# Altium PCB PCB12.PcbDoc
Units mil, origin at the board's own origin, x right, y up, seen from the top; angles counter-clockwise.
Board outline 6000 x 4000 mil, 2 copper layers (Top Layer, Bottom Layer); 16 components, 21 nets, 90 pads, 0 vias.
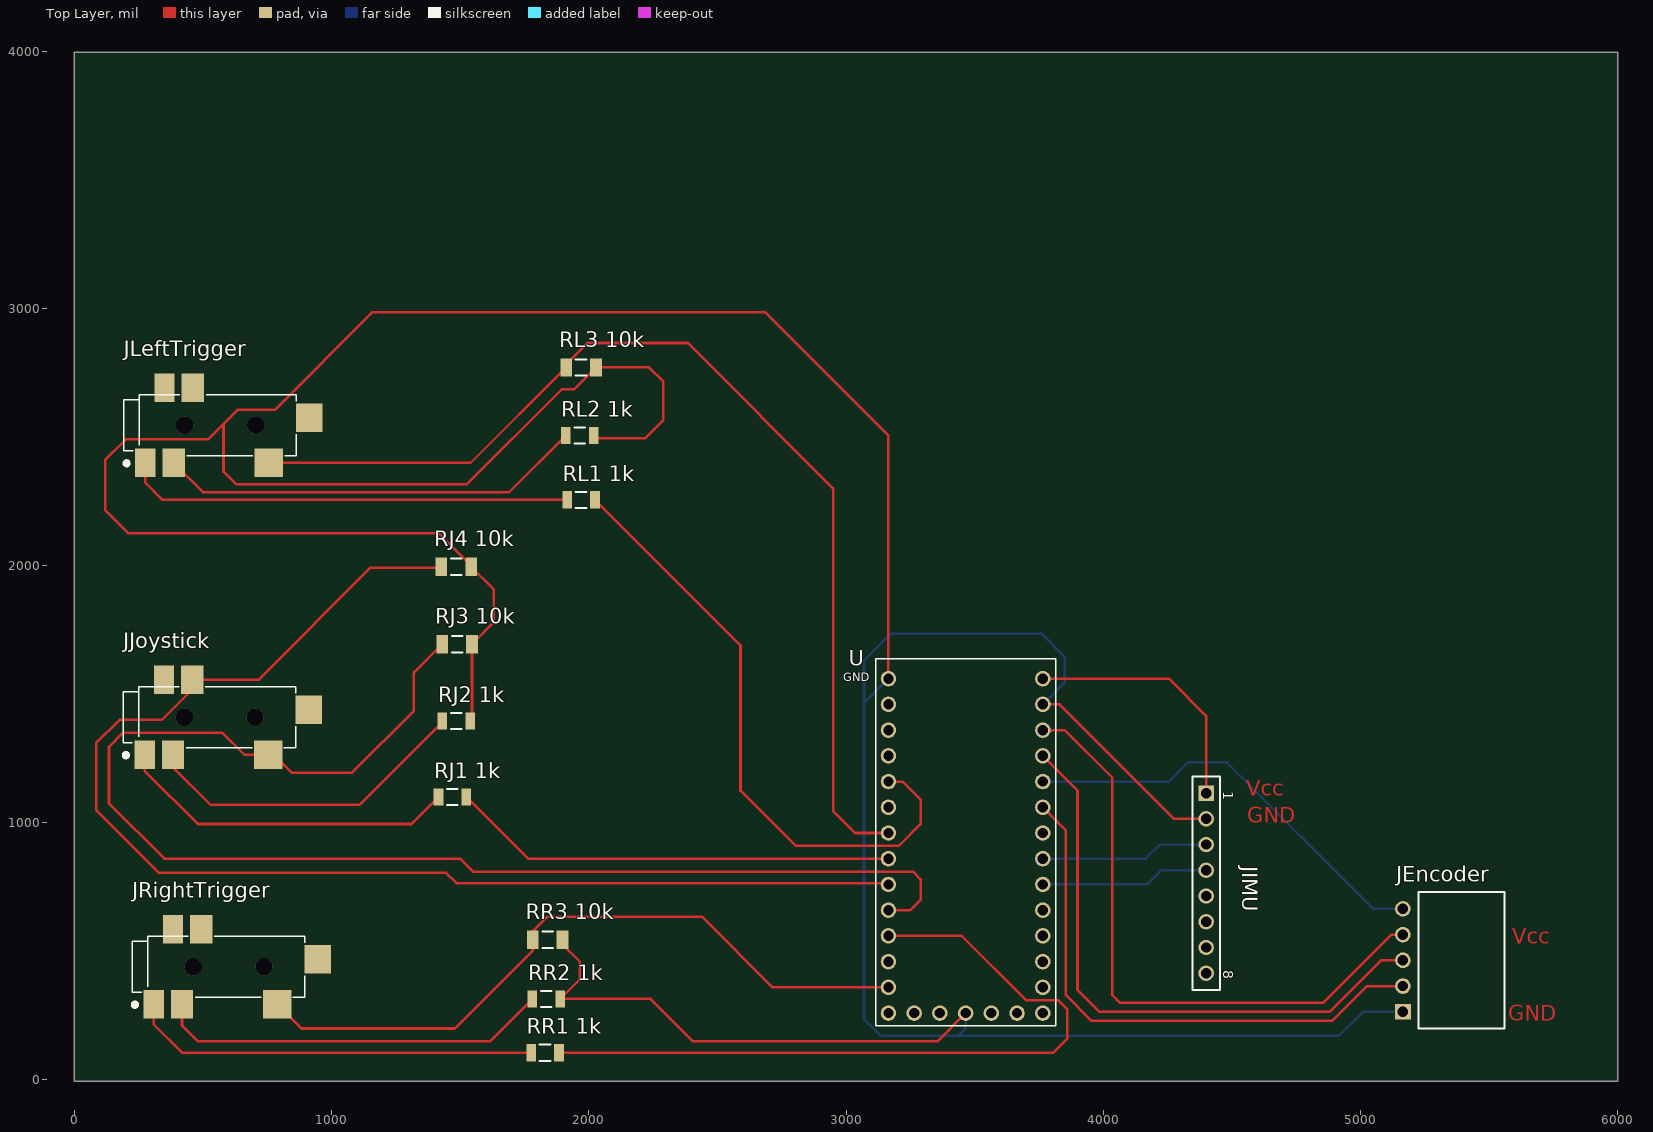
[diagram p0: Top Layer view]
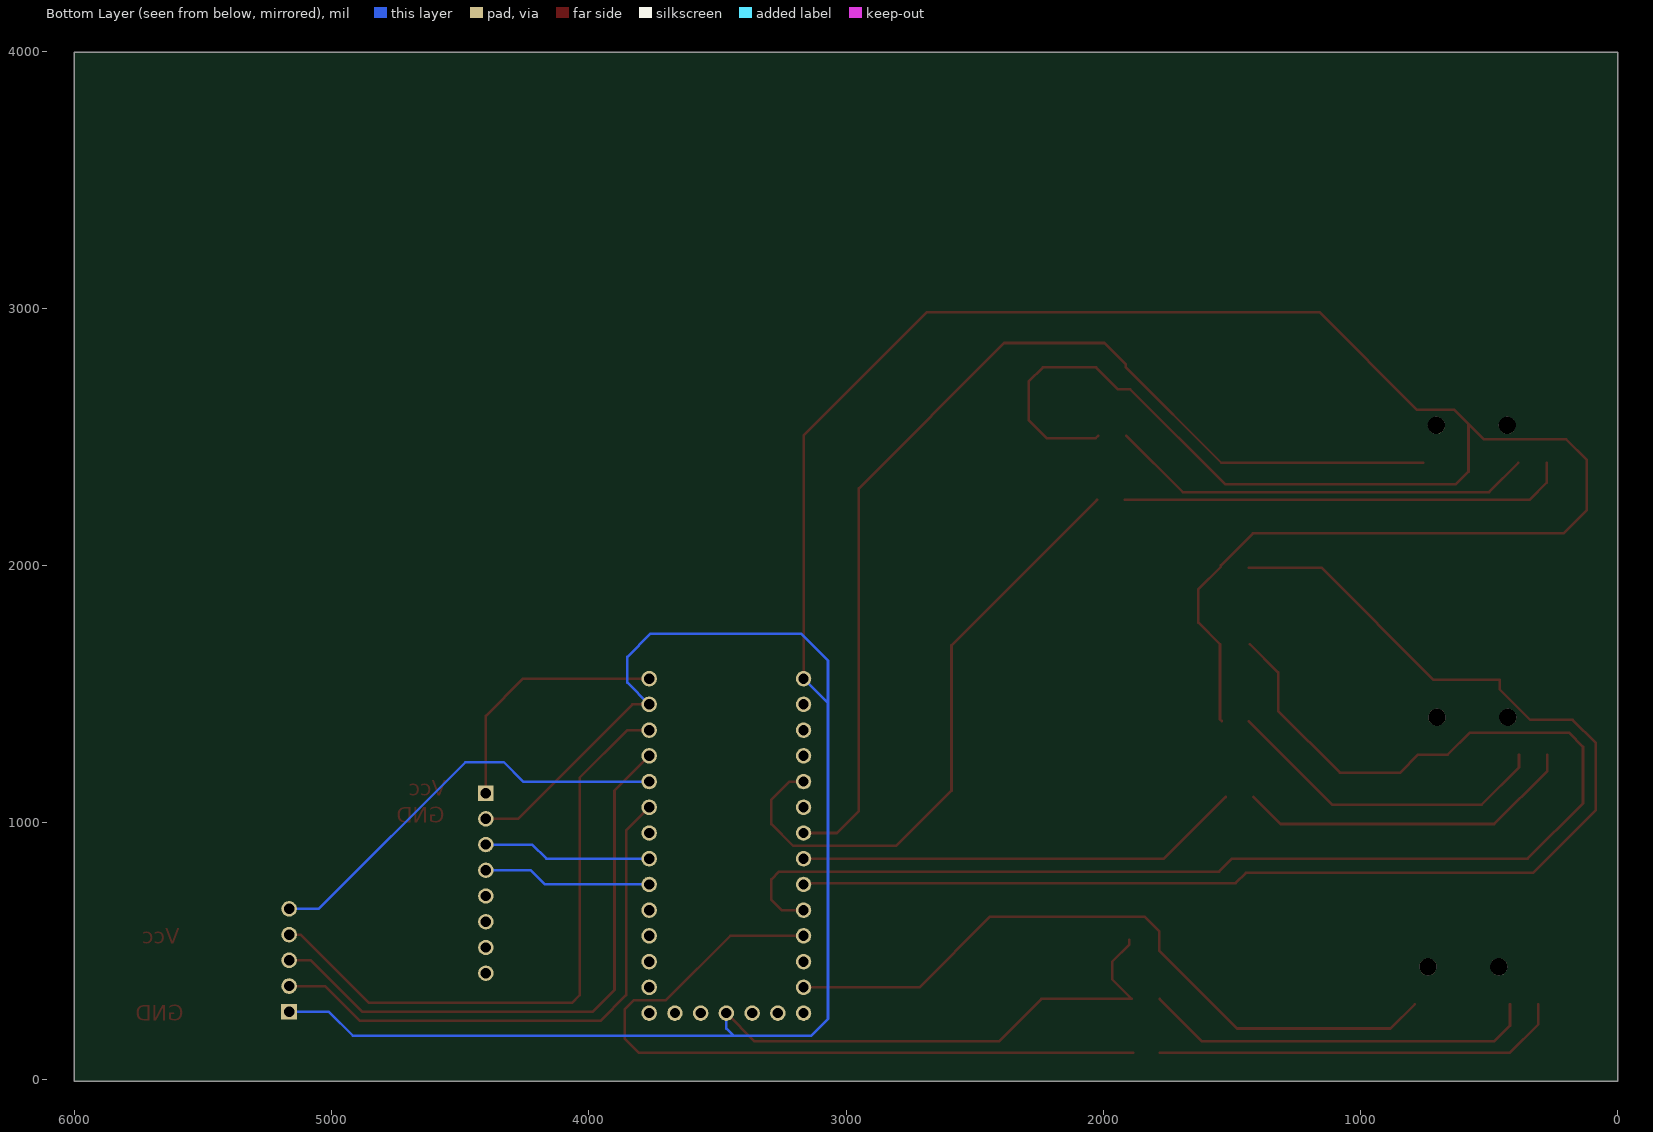
[diagram p1: Bottom Layer view, seen from below]
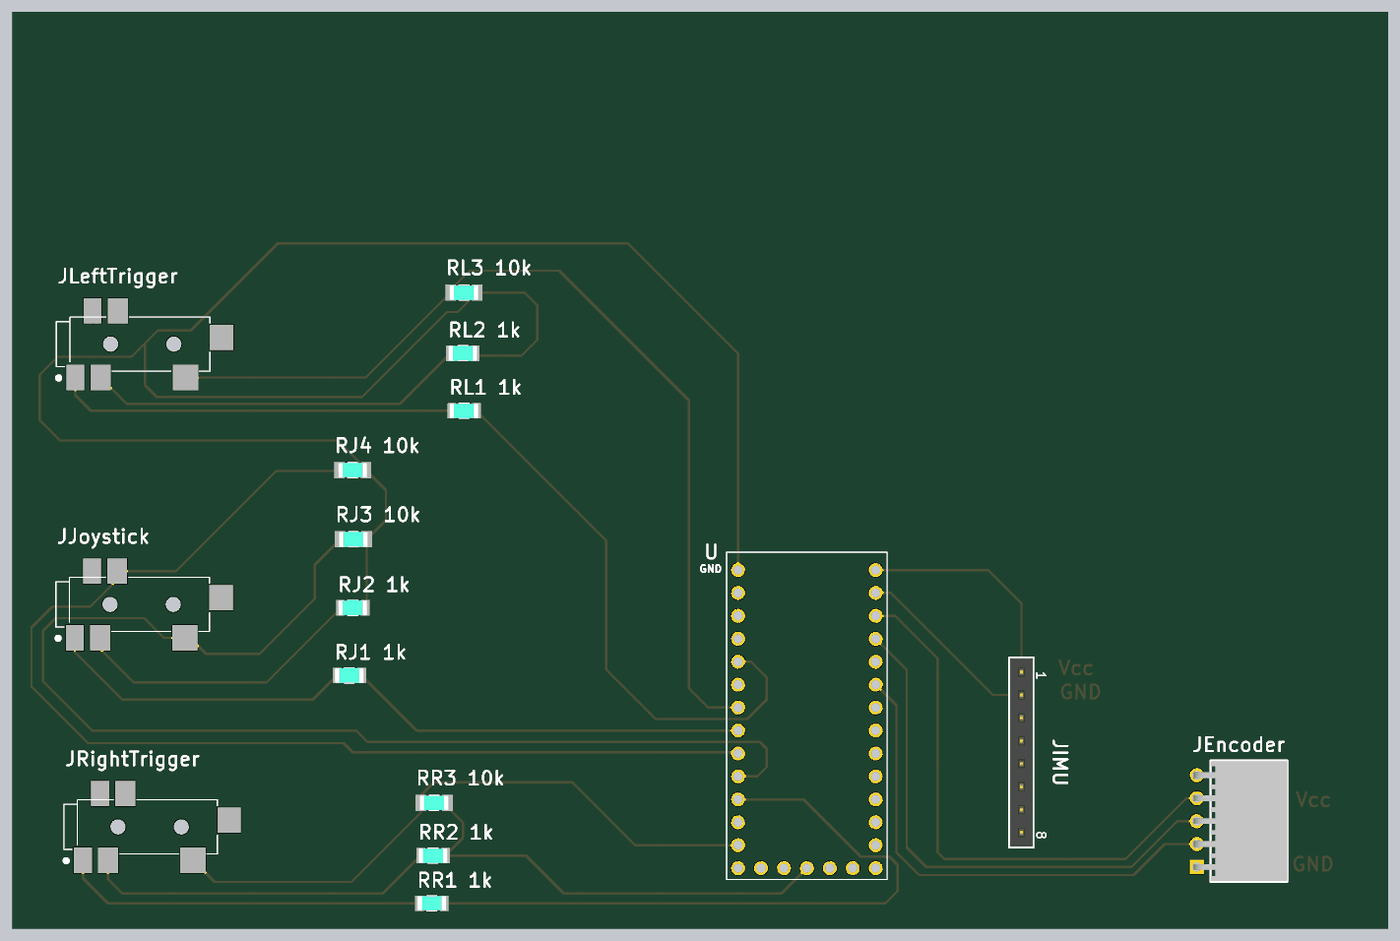
[diagram p2: 3D render of the assembled board from above, using the file's embedded part models]

## Layer stack, top to bottom
Top Solder: solder mask 0.4, Solder Resist, Dk 3.5
Top Layer: signal copper 1.4
Dielectric 1: dielectric 12.6, FR-4, Dk 4.8
Bottom Layer: signal copper 1.4
Bottom Solder: solder mask 0.4, Solder Resist, Dk 3.5

## Board outline
0,-5 6000,-5 6000,3995 0,3995

## Design rules (kind name [scope] priority, off if disabled: settings)
Clearance [All] p1: gap=10 ignorepadtopadclearanceinfootprint=FALSE except(0: Arc-Hole Track-Hole SMDPad-Hole THPad-Hole Via-Hole Fill-Hole Poly-Hole Region-Hole Text-Hole)
PolygonConnect [All] p1: connectstyle=Relief reliefconductorwidth=10 reliefentries=4 polygonreliefangle="90 Angle" airgapwidth=10
RoutingVias [All] p1: holewidth=28 width=50 viastyle="Through Hole" minholewidth=28 minwidth=50 maxholewidth=28 maxwidth=50
SolderMaskExpansion [All] p1: expansion=4
Width [All] p1: maxlimit=10 minlimit=10 preferedwidth=10
30 further rules are at their usual default settings.

## Components (designator, comment, footprint, x,y, rotation, side; value= is the part's Value field where it differs from the comment)
JEncoder "SSQ-105-02-T-S-RA" SMTC-SSQ-105-02-X-S-RA 5165,265 r90 top
JIMU "61300811821" 61300811821 4400,765 r270 top
JJoystick "SJ-43516-SMT-BE" CUI_SJ-43516-SMT-BE 555,1410 r0 top
JLeftTrigger "SJ-43516-SMT-BE" CUI_SJ-43516-SMT-BE 557.36,2545 r0 top
JRightTrigger "SJ-43516-SMT-BE" CUI_SJ-43516-SMT-BE 590,440 r0 top
"RJ1 1k" "RN732BTTDK1001B25" FP-RN732B-IPC_C 1470,1100 r0 top
"RJ2 1k" "RN732BTTDK1001B25" FP-RN732B-IPC_C 1485,1395 r0 top
"RJ3 10k" "RN732BTTD1002D10" FP-RN732B-IPC_B 1488.09,1693.82 r0 top
"RJ4 10k" "RN732BTTD1002D10" FP-RN732B-IPC_B 1485,1995 r0 top
"RL1 1k" "RN732BTTDK1001B25" FP-RN732B-IPC_C 1970,2255 r0 top
"RL2 1k" "RN732BTTDK1001B25" FP-RN732B-IPC_C 1965,2505 r0 top
"RL3 10k" "RN732BTTD1002D10" FP-RN732B-IPC_B 1970,2770 r0 top
"RR1 1k" "RN732BTTDK1001B25" FP-RN732B-IPC_C 1830,105.85 r0 top
"RR2 1k" "RN732BTTDK1001B25" FP-RN732B-IPC_C 1835,315 r0 top
"RR3 10k" "RN732BTTD1002D10" FP-RN732B-IPC_B 1840,545 r0 top
U "DEV-15583" MODULE_DEV-15583 3465,910 r0 top

## Footprints (in the part's own frame and the unit in brackets; to place one, negate y for a bottom-side part, rotate by r counter-clockwise, add the part's x,y. Pads: shape width x height; smd on the part's side, far side on the other; paste and mask are expansions set on the pad)
61300811821 [mm] "Socket Header, Pitch 2.54 mm, THT, Vertical, single row, 8p"
  rect 1.52x1.52 hole 1.02: 1(-8.89,0)
  round 1.52 hole 1.02: 2(-6.35,0) 3(-3.81,0) 4(-1.27,0) 5(1.27,0) 6(3.81,0) 7(6.35,0) 8(8.89,0)
  silkscreen extent -10.54,-1.35 10.54,1.35, body extent -10.41,-1.25 10.41,1.25, height 8.55
CUI_SJ-43516-SMT-BE [mm]
  rect 2x2.8 smd: 1(-7.15,-3.7) 6(-5.25,3.7)
  rect 2.8x2.8 smd: 2(5.05,-3.7)
  rect 2.2x2.8 smd: 3(-2.45,3.7) 4(-4.35,-3.7)
  rect 2.6x2.8 smd: 5(9.05,0.75)
  round 1.7 hole 1.7 unplated: ""(-3.25,0) ""(3.75,0)
  silkscreen extent -9.25,-3.95 7.75,3
FP-RN732B-IPC_B [mil]
  rect 45.48x71.11 smd paste+0 mask+0: 1(-58.09,0) 2(58.09,0)
  silkscreen extent -21,-31 21,31, body extent -91,-45 91,45, height 10
FP-RN732B-IPC_C [mil]
  rect 37.61x67.17 smd paste+0 mask+0: 1(-54.15,0) 2(54.15,0)
  silkscreen extent -21,-31 21,31, body extent -77,-39 77,39, height 10
MODULE_DEV-15583 [mm]
  round 1.53 hole 1.02: 0(-7.62,13.97) 1(-7.62,11.43) 2(-7.62,8.89) 3(-7.62,6.35) 3.3V_1(-2.54,-16.51) 3.3V_2(7.62,11.43) 4(-7.62,3.81) 5(-7.62,1.27) 6(-7.62,-1.27) 7(-7.62,-3.81) 8(-7.62,-6.35) 9(-7.62,-8.89) 10(-7.62,-11.43) 11(-7.62,-13.97) 12(-7.62,-16.51) 13(7.62,-16.51) 14(7.62,-13.97) 15(7.62,-11.43) 16(7.62,-8.89) 17(7.62,-6.35) 18(7.62,-3.81) 19(7.62,-1.27) 20(7.62,1.27) 21(7.62,3.81) 22(7.62,6.35) 23(7.62,8.89) G1(-7.62,16.51) G2(0,-16.51) G3(7.62,13.97) ON-OFF(5.08,-16.51) PGM(2.54,-16.51) VBAT(-5.08,-16.51) VIN(7.62,16.51)
  silkscreen extent -8.89,-17.78 8.89,18.48
SMTC-SSQ-105-02-X-S-RA [mm] "SQ Post Socket, 1x5 Pins, Right Angle, 2.54mm Pitch, Female"
  rect 1.55x1.55 hole 1.02: 1(0,0)
  round 1.55 hole 1.02: 2(2.54,0) 3(5.08,0) 4(7.62,0) 5(10.16,0)
  silkscreen extent -1.65,-10.03 11.81,-1.52, body extent -1.52,-10.03 11.68,0.32, height 2.41

## Part data
JEncoder: library part CMP-1023-00281-1, "SQ Post Socket, Through-hole, Right Angle, -55 to 105 degC, 2.54 mm Pitch, 5-Pin, Female, RoHS", Manufacturer=Samtec, Temperature Range="-55 to 105 degC", ComponentLink1Description="Manufacturer URL", ComponentLink1URL=http://www.samtec.com, ComponentLink2Description=Datasheet, ComponentLink2URL=http://www.samtec.com/documents/webfiles/pdf/SSQ_TH.PDF, ComponentLink3Description="Package Specification", ComponentLink3URL=http://www.samtec.com/documents/webfiles/cpdf/SSQ-1XX-XX-XXX-X-XX-XXX-XX-X-MKT.pdf, DatasheetVersion=F-214, Mounting Technology=Through-hole, Orientation="Right Angle", PackageDescription="Assembly, Socket Strip .025[0.64] SQ Tail", PackageReference=SSQ-105-02-X-S-RA, PackageVersion="BD, 6/1987", PartNumber=SSQ-105-02-T-S-RA, Pitch="2.54 mm", RoHS=True
JIMU: library part CMP-1502-01327-1, "THT Vertical Socket Header WR-PHD, Pitch 2.54 mm, Single Row, 8 pins", Contact Resistance=20mOhm, Manufacturer="Wurth Elektronik", Operating Temperature=-40to125degC, Rated Current=3A, Withstanding Voltage=500VAC, Working Voltage=250VAC, Datasheet URL=https://katalog.we-online.de/em/datasheet/6130xx11821.pdf, Gender=Female, Manufacturer URL=http://www.we-online.de, Mounting Technology=THT, Orientation=Vertical, Package Reference=61300811821, Packaging=Tray, Part Number=61300811821, Pin Number=8, Pitch=2.54mm, Publisher=WurthElektronik, Row Number=Single
JJoystick JLeftTrigger JRightTrigger: "3.5 mm, 4 Conductors, Right Angle, Surface Mount _SMT_, Audio Jack Connector", Package=None, Availability=Unavailable, MF="CUI Devices", MP=SJ-43516-SMT-TR-BE, Price=None, SnapEDA_Link=https://www.snapeda.com/parts/SJ-43516-SMT-TR-BE/CUI%20Devices/view-part/490913/?ref=snap
"RJ1 1k" "RJ2 1k" "RL1 1k" "RL2 1k" "RR1 1k" "RR2 1k": library part CMP-04015-036806-1, "1kΩ ±0.1% 0.125W, 1/8W Chip Resistor 1206 (3216 Metric) Moisture Resistant Thin Film", Case/Package=1206, Case Code (Metric)=3216, Max Operating Temperature=125°C, Min Operating Temperature=-55°C, Power Rating=125mW, Resistance=1kR, Temperature Coefficient=25ppm/°C, Tolerance=0.1%, Voltage Rating=150V, Case Code (Imperial)=1206, Composition="Thin Film", Height=0.6mm, Length=3.2mm, Packaging="Tape and Reel", Termination=SMD/SMT, Voltage Rating (DC)=150V, Weight=0.000571oz, Width=1.6mm
"RJ3 10k" "RJ4 10k" "RL3 10k" "RR3 10k": library part CMP-04015-044241-1, "10kΩ ±0.5% 0.125W, 1/8W Chip Resistor 1206 (3216 Metric) Moisture Resistant Thin Film", Case/Package=1206, Case Code (Metric)=3216, Max Operating Temperature=125°C, Min Operating Temperature=-55°C, Package Quantity=5000, Power Rating=125mW, Resistance=10kR, Temperature Coefficient=10ppm/°C, Tolerance=0.5%, Voltage Rating=150V, Case Code (Imperial)=1206, Composition="Thin Film", Height=0.6mm, Length=3.2mm, Packaging="Tape and Reel", Termination=SMD/SMT, Width=1.6mm
U: "RT1062 Teensy 4.0 i.MX ARM?? Cortex??-M7 MPU Embedded Evaluation Board", Package=None, Digi-Key_Part_Number=1568-DEV-15583-ND, Digi-Key_Purchase_URL=https://www.digikey.com/product-detail/en/sparkfun-electronics/DEV-15583/1568-DEV-15583-ND/10384551?utm_source=snapeda&utm_medium=aggregator&utm_campaign=symbol, MF="SparkFun Electronics", MP=DEV-15583, SnapEDA_Link=https://www.snapeda.com/parts/DEV-15583/SparkFun%20Electronics/view-part/4001229/?ref=snap

## Nets (pads, with @x,y where several pads share a name; then routed paths per layer and width w, separated by ;. In a path a pad name is that pad's centre, name@x,y a point inside that pad or via, vN(x,y) a via of type N, cw(c..) or ccw(c..) an arc to the next point about the centre after c; other vN are vias at no path point)
GND: "RJ2 1k.2" "RJ3 10k.2" "RJ4 10k.2" "RL2 1k.2" "RL3 10k.2" "RR2 1k.2" "RR3 10k.2" JEncoder.1 JIMU.2 U.G1 U.G2 U.G3 | length 17058.9
  Top Layer w10: 1539.15,1395 1546.18,1402.03 1546.18,1693.82 1630,1777.64 1630,1908.09 1543.09,1995 1543.09,2000 1418.09,2125 210,2125 120,2215 120,2410 200,2490 520,2490 580,2550 ; 1898.09,545 1898.09,526.91 1965,460 1965,390.85 1889.15,315 2240,315 2405,150 3355,150 U.G2 ; 2019.15,2505 2029.15,2495 2220,2495 2290,2565 2290,2715 2235,2770 2028.09,2770 1943.09,2685 1895,2685 1525,2315 630,2315 580,2365 580,2550 ; U.G1 3165,2505 2685,2985 1160,2985 780,2605 635,2605 580,2550 ; U.G3 3830,1460 4275,1015 JIMU.2
  Bottom Layer w10: U.G1 3070,1465 ; U.G2 3465,200 3437.5,172.5 ; U.G3 3850,1545 3850,1645 3760,1735 3175,1735 3070,1630 3070,1465 ; JEncoder.1 5010,265 4917.5,172.5 3437.5,172.5 ; 3070,1465 3070,237.5 3135,172.5 3437.5,172.5
NetJEncoder_2: JEncoder.2 U.21 | length 2174.6
  Top Layer w10: U.21 3855,970 3855,330 3955,230 4890,230 5025,365 JEncoder.2
NetJEncoder_3: JEncoder.3 U.23 | length 2349
  Top Layer w10: U.23 3900,1125 3900,350 3985,265 4880,265 5080,465 JEncoder.3
NetJEncoder_4: JEncoder.4 U.3.3V_2 | length 2443.8
  Top Layer w10: U.3.3V_2 3850,1360 4035,1175 4035,330 4065,300 4855,300 5120,565 JEncoder.4
NetJEncoder_5: JEncoder.5 U.22 | length 1667.2
  Bottom Layer w10: U.22 4255,1160 4330,1235 4480,1235 5050,665 JEncoder.5
NetJIMU_1: JIMU.1 U.VIN | length 995.1
  Top Layer w10: U.VIN 4255,1560 4400,1415 JIMU.1
NetJIMU_3: JIMU.3 U.19 | length 657.8
  Bottom Layer w10: U.19 4165,860 4220,915 JIMU.3
NetJIMU_4: JIMU.4 U.18 | length 657.8
  Bottom Layer w10: U.18 4170,760 4225,815 JIMU.4
NetJJoystick_1: "RJ1 1k.1" JJoystick.1 | length 1334.2
  Top Layer w10: JJoystick.1 273.5,1201.5 480,995 1310.85,995 1415.85,1100
NetJJoystick_2: "RJ3 10k.1" JJoystick.2 U.8 | length 5394.5
  Top Layer w10: 1430,1693.82 1320,1583.82 1320,1435 1080,1195 845,1195 775.67,1264.33 JJoystick.2 660.67,1264.33 575,1350 190,1350 135,1295 135,1075 350,860 1499.15,860 1549.15,810 3260,810 3290,780 3290,700 3250,660 U.8
NetJJoystick_3: "RJ4 10k.1" JJoystick.3 U.7 | length 5114.3
  Top Layer w10: 1435,1991.91 1151.91,1991.91 715.67,1555.67 JJoystick.3 458.54,1518.54 340,1400 175,1400 85,1310 85,1050 330,805 1445,805 1485,765 3160,765 U.7
NetJJoystick_4: "RJ2 1k.1" JJoystick.4 | length 1295.4
  Top Layer w10: JJoystick.4 383.74,1214.8 528.54,1070 1110,1070 1435,1395
NetJLeftTrigger_1: "RL1 1k.1" JLeftTrigger.1 | length 1744.8
  Top Layer w10: JLeftTrigger.1 275.87,2322.44 343.31,2255 1915.85,2255
NetJLeftTrigger_2: "RL3 10k.1" JLeftTrigger.2 U.5 | length 4132.9
  Top Layer w10: JLeftTrigger.2 1541.24,2399.33 1911.91,2770 1911.91,2781.91 1995,2865 2385,2865 2950,2300 2950,1045 3035,960 U.5
NetJLeftTrigger_4: "RL2 1k.1" JLeftTrigger.4 | length 1663.2
  Top Layer w10: JLeftTrigger.4 500.43,2285 1690.85,2285 1910.85,2505
NetJRightTrigger_1: "RR1 1k.1" JRightTrigger.1 | length 1595.2
  Top Layer w10: JRightTrigger.1 308.5,216.5 419.15,105.85 1780,105.85
NetJRightTrigger_2: "RR3 10k.1" JRightTrigger.2 U.11 | length 2753.3
  Top Layer w10: JRightTrigger.2 883.15,200 1480,200 1781.91,501.91 1781.91,545 1781.91,576.91 1840,635 2440,635 2715,360 U.11
NetJRightTrigger_4: "RR2 1k.1" JRightTrigger.4 | length 1538.9
  Top Layer w10: JRightTrigger.4 418.74,211.26 480,150 1615.85,150 1780.85,315
"NetRJ1 1k_2": "RJ1 1k.2" U.6 | length 1740.3
  Top Layer w10: 1524.15,1100 1764.15,860 U.6
"NetRL1 1k_2": "RL1 1k.2" U.3 | length 2437.6
  Top Layer w10: 2024.15,2255 2590,1689.15 2590,1125 2805,910 3205,910 3290,995 3290,1090 3220,1160 U.3
"NetRR1 1k_2": "RR1 1k.2" U.9 | length 2926.3
  Top Layer w10: 1884.15,105.85 3805.85,105.85 3860,160 3860,275 3825,310 3700,310 3450,560 U.9
pads on no net: JIMU.5 JIMU.6 JIMU.7 JIMU.8 JJoystick. JJoystick.5 JJoystick.6 JLeftTrigger. JLeftTrigger.3 JLeftTrigger.5 JLeftTrigger.6 JRightTrigger. JRightTrigger.3 JRightTrigger.5 JRightTrigger.6 U.0 U.1 U.2 U.3.3V_1 U.4 U.10 U.12 U.13 U.14 U.15 U.16 U.17 U.20 U.ON-OFF U.PGM U.VBAT

## Other copper
Top Layer:
  text "Vcc" at 4555,1105 h60
  text "GND" at 4560,1000 h60
  text "Vcc" at 5590,530 h60
  text "GND" at 5575,230 h60

## Text inside footprints (layer, text, board x,y; h text height)
JIMU: Top Overlay "8" at 4466.93,427.2 h40 r270; Top Overlay "1" at 4466.93,1122.48 h40 r270
U: Top Overlay "GND" at 2990,1550 h32; Mechanical 13 "GND" at 2990,1550 h32